# EAGLE board proiect_v13 (EAGLE 9.7.0)
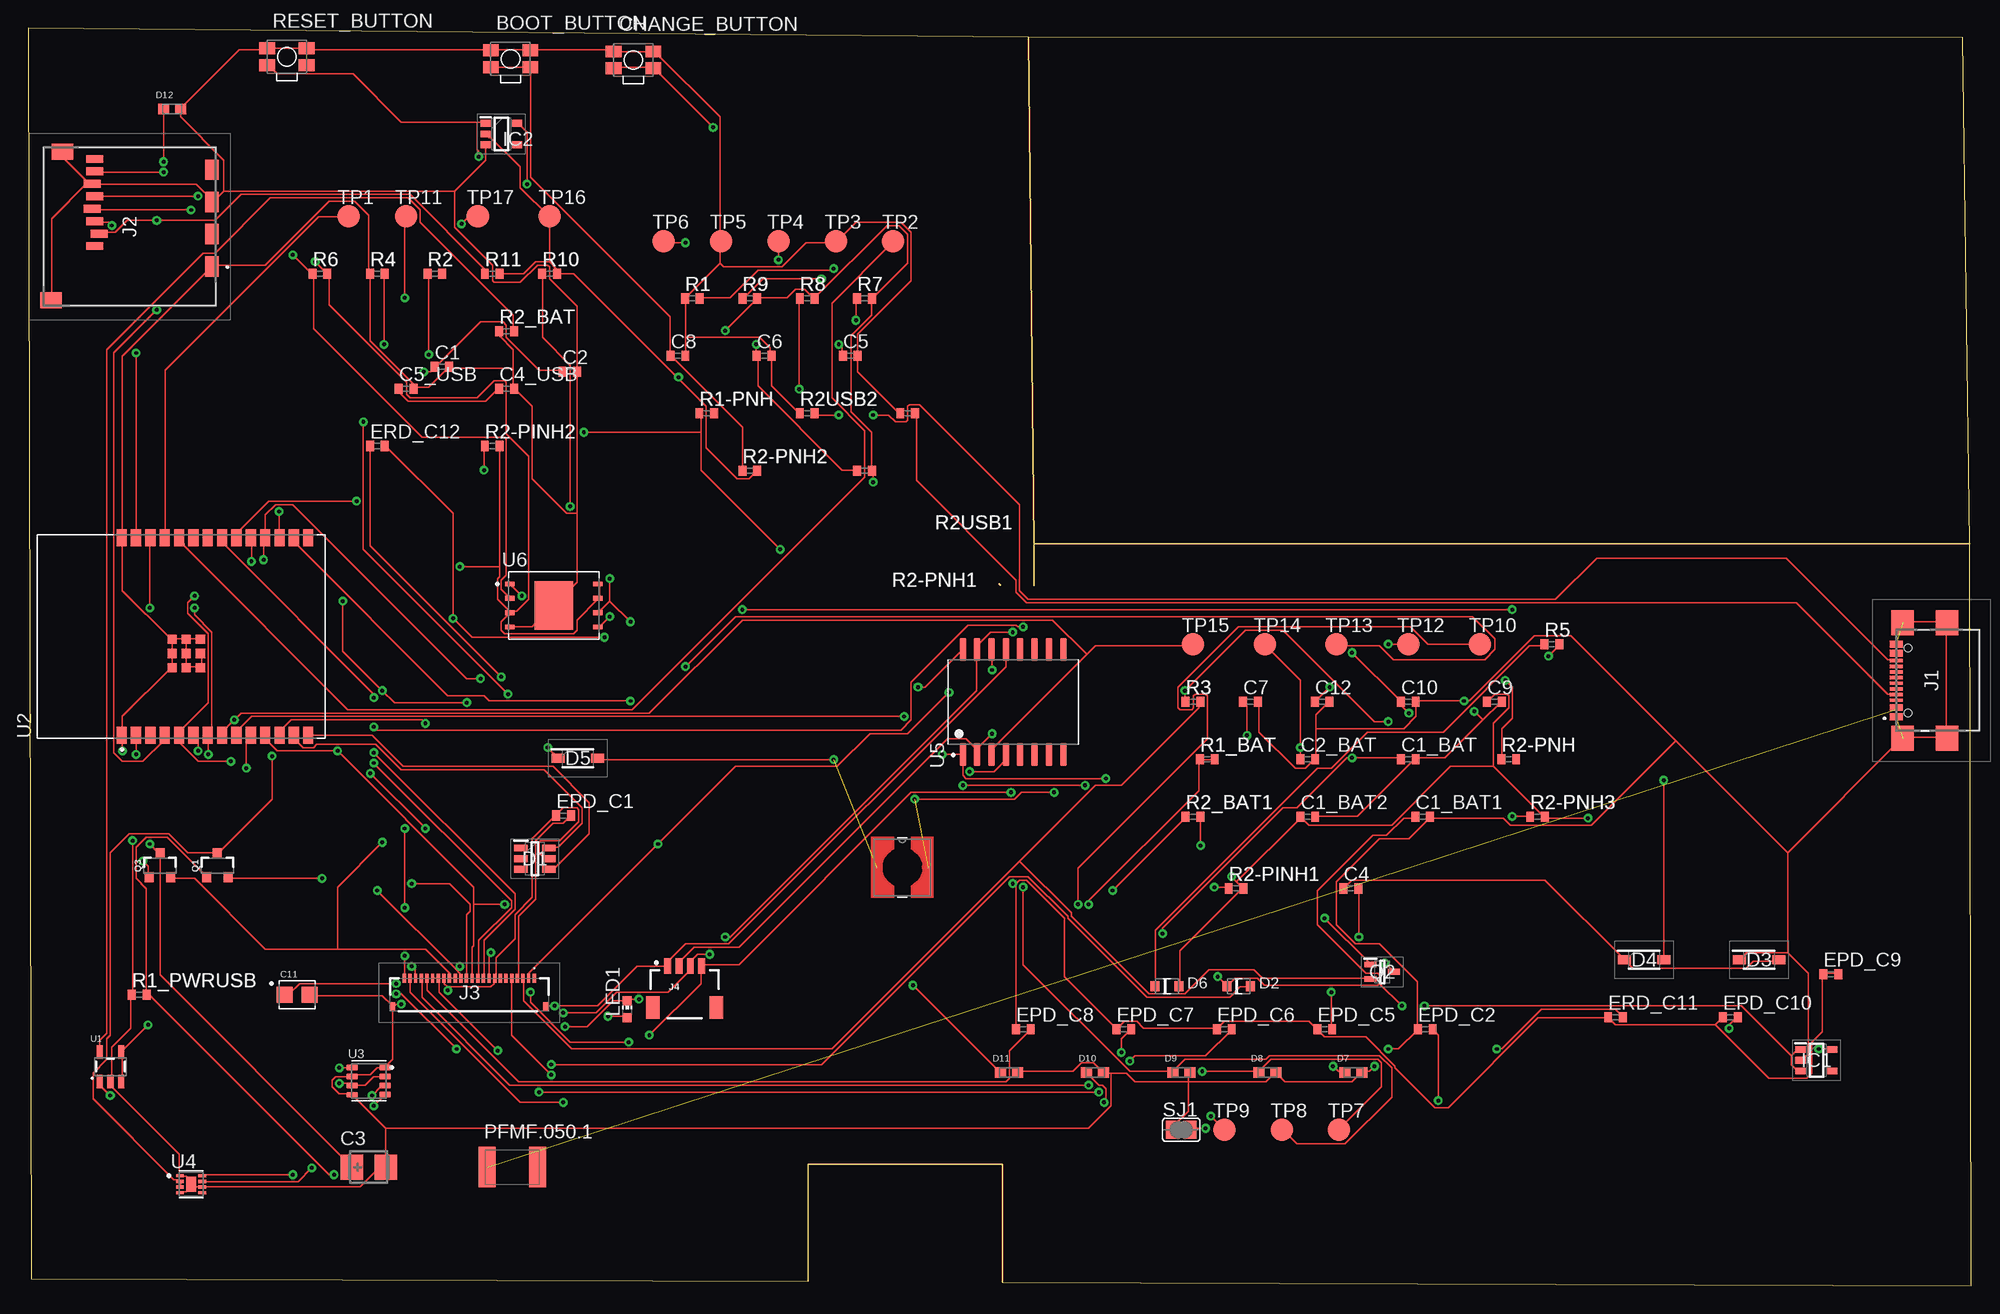
[diagram p0: board, top side]
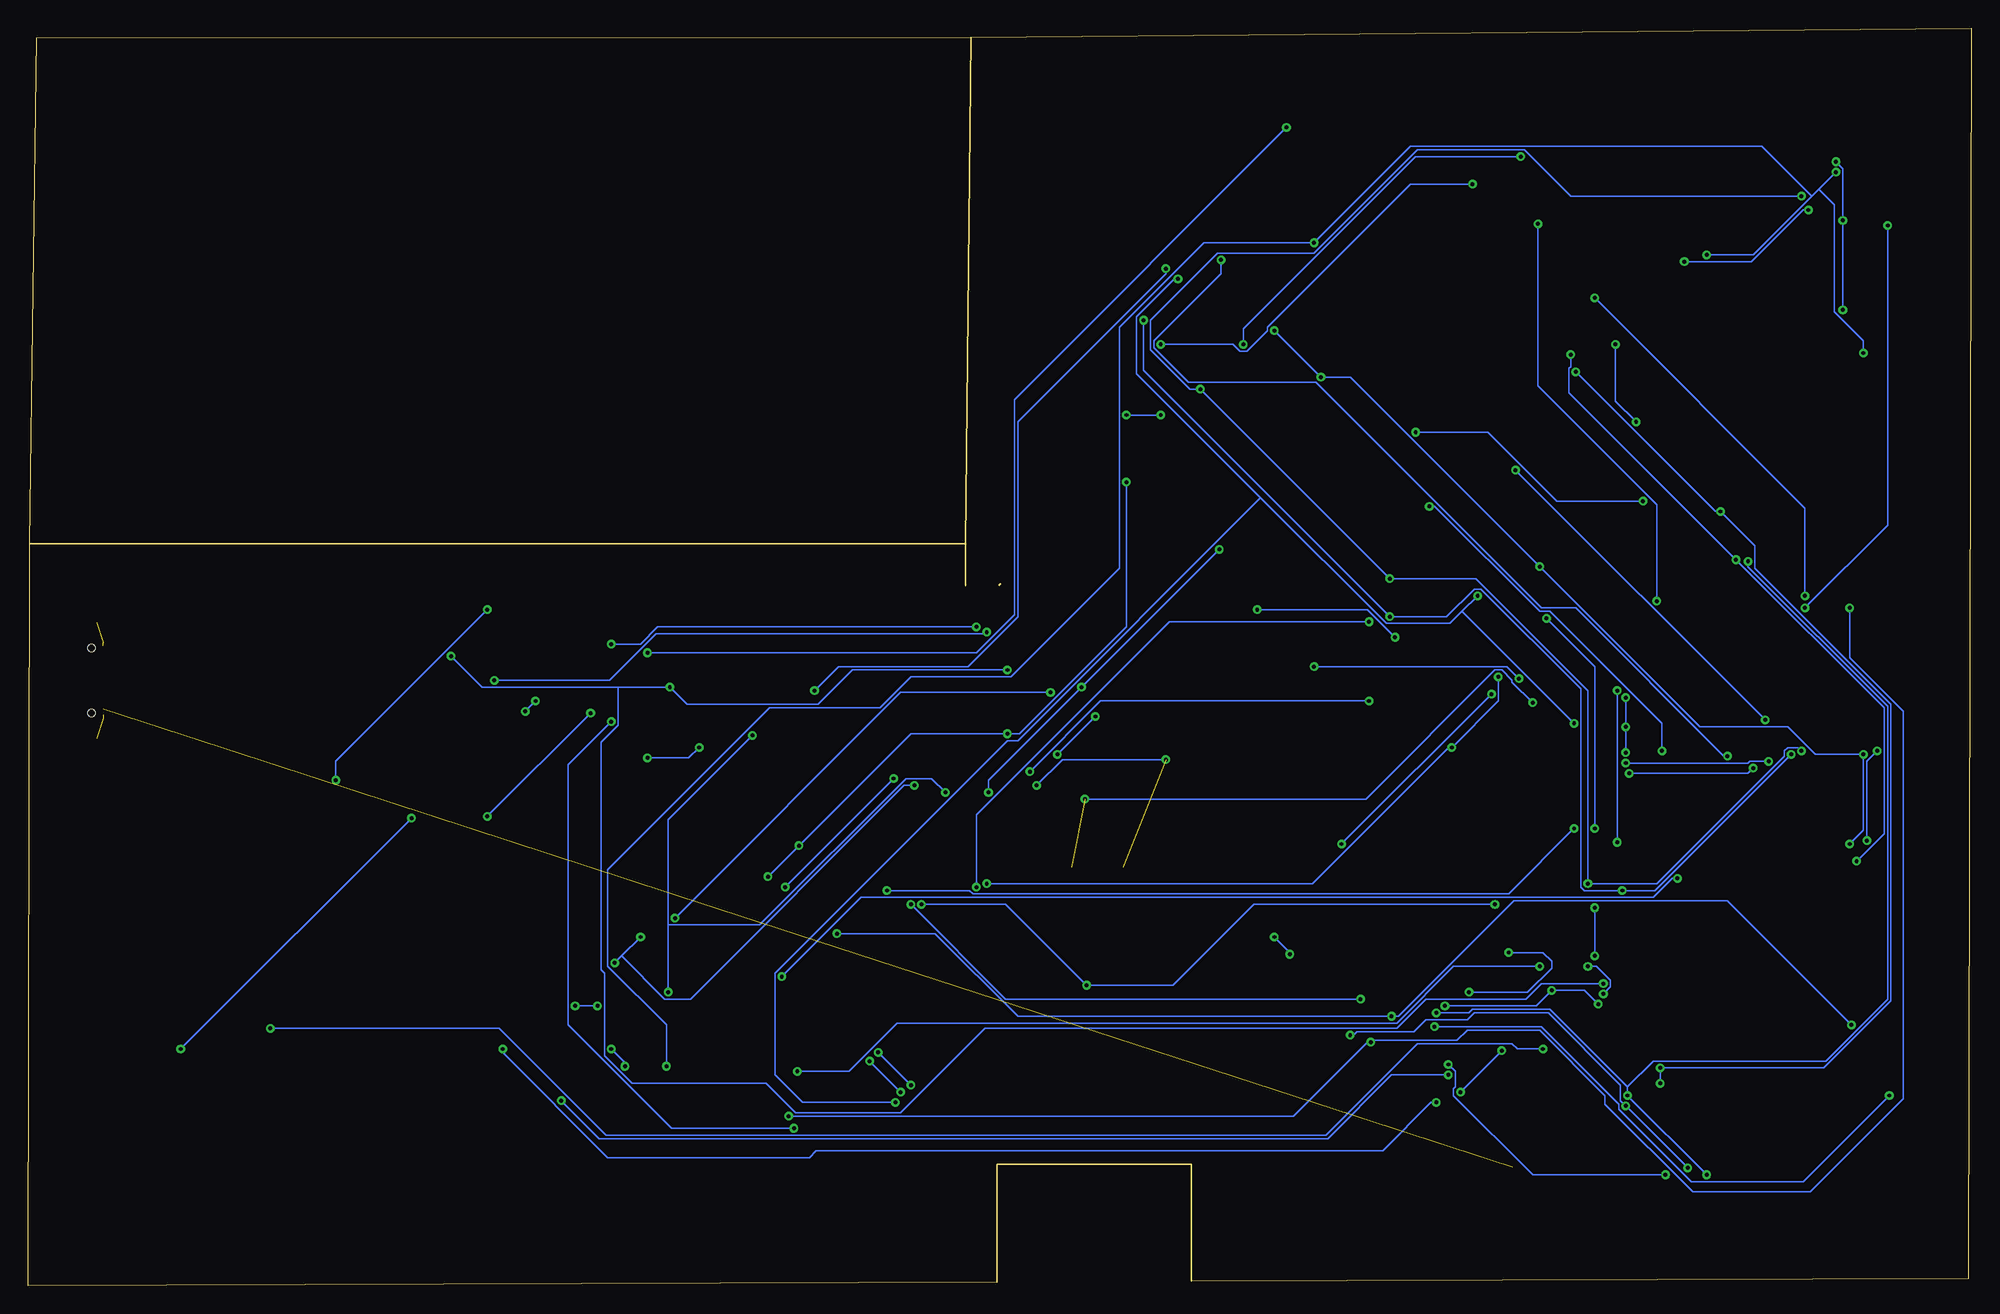
[diagram p1: board, bottom side, seen from below]

Size 171.92 x 111.22 mm. Coordinates in mm from the lower left corner, seen from the top.
Outline: 171.78,65.63 171.92,0 86.21,0.3 86.21,10.73 69,10.73 69,0.36 0.24,0.61 0,111.22 88.49,110.41
Outline: 171.78,65.63 171.17,110.36 88.49,110.41
Outline: 85.92,62.09 86.04,61.96
Outline: 89,61.89 89,65.63
Outline: 89,65.63 88.49,110.41
Outline: 89,65.63 171.78,65.63
Copper layers (1*16): Top 0.035mm / dielectric 1.5mm / Bottom 0.035mm
Design rules "Fusion Electronics Design Rules": minimum track width 6mil, minimum drill 0.35mm, track to track 6mil, track to pad 6mil, pad to pad 6mil, via to via 6mil, smd to smd 6mil, copper to edge 40mil, drill to drill 6mil, minimum pad ring 10mil, minimum via ring 8mil, stop-mask expansion 4mil, vias tented up to drill 9999mil, thermal gap 10mil

## Footprints (pad centres in the part's own frame; a part is rotated, then mirrored left to right if it is on the bottom)
MYBUTTON = smd 1.4 x 1.05: 1 1.75,0.75; 2 -1.75,0.75; 3 -1.75,-0.75; 4 1.75,-0.75
EAGLE-LTSPICE_C0402 = smd 0.7 x 0.9: 1 -0.65,0; 2 0.65,0
RCL_CT3528 = smd 2 x 2.2: + -1.5,0; - 1.5,0
CAPCP3225X100N = smd 1.4 x 1.4: 1 -1.1,0; 2 1.1,0
ESP32_WROVER_EAGLE-LTSPICE_C0402 = smd 0.7 x 0.9: 1 -0.65,0; 2 0.65,0
SOT95P280X145-6N = smd 1.2 x 0.6: 1 -1.25,0.95; 2 -1.25,0; 3 -1.25,-0.95; 4 1.25,-0.95; 5 1.25,0; 6 1.25,0.95
ESP32_WROVER_AVX---SD0805S020S1R0_AVX_SD0805S020S1R0_0 = smd 0.8 x 0.9: 1 -1.05,0; 2 1.05,0
SOD3716X135N = smd 1.15 x 0.8: 1 -1.75,0; 2 1.75,0
DIOC1608X36N = smd 0.97 x 0.94: 1 -0.75,0; 2 0.75,0
SOT95P280X120-5N = smd 0.9 x 0.6: 1 -1.4,0.95; 2 -1.4,0; 3 -1.4,-0.95; 4 1.4,-0.95; 5 1.4,0.95
SOT95P280X125-5N = smd 0.9 x 0.6: 1 -1.4,0.95; 2 -1.4,0; 3 -1.4,-0.95; 4 1.4,-0.95; 5 1.4,0.95
SAMACSYS_PARTS_USB4110GFA = smd 0.3 x 1.15: A1 -3.35,3.678; A4 -2.55,3.678; A5 -1.25,3.678; A6 -0.25,3.678; A7 0.25,3.678; A8 1.25,3.678; A9 2.55,3.678; A12 3.35,3.678; B1 3.05,3.678; B4 2.25,3.678; B5 1.75,3.678; B6 0.75,3.678; B7 -0.75,3.678; B8 -1.75,3.678; B9 -2.25,3.678; B12 -3.05,3.678 | smd 2.18 x 2: MP1 -5.11,-0.827; MP2 5.11,-0.827; MP3 -5.11,3.103; MP4 5.11,3.103 | hole 0.65: -2.89,2.603; 2.89,2.603
112ATAARR03ATTEND = smd 1.8 x 1.2: G1 10.6,10.4; G2 4.9,10.4; S1 7.75,10.4; S2 2.05,10.4 | smd 1.4 x 1.9: G3 13.6,-3.85; G4 0.45,-2.85 | smd 0.7 x 1.5: P1 8.8,0; P2 7.7,0.4; P3 6.6,0; P4 5.5,-0.2; P5 4.4,0; P6 3.3,-0.2; P7 2.2,0; P8 1.1,0
FH34SRJ24S05SH99 = smd 0.3 x 0.8: 1 5.75,1.45; 2 5.25,1.45; 3 4.75,1.45; 4 4.25,1.45; 5 3.75,1.45; 6 3.25,1.45; 7 2.75,1.45; 8 2.25,1.45; 9 1.75,1.45; 10 1.25,1.45; 11 0.75,1.45; 12 0.25,1.45; 13 -0.25,1.45; 14 -0.75,1.45; 15 -1.25,1.45; 16 -1.75,1.45; 17 -2.25,1.45; 18 -2.75,1.45; 19 -3.25,1.45; 20 -3.75,1.45; 21 -4.25,1.45; 22 -4.75,1.45; 23 -5.25,1.45; 24 -5.75,1.45 | smd 0.4 x 0.8: MP1 6.75,-1.05; MP2 -6.75,-1.05
JST04_1MM_RA = smd 0.6 x 1.35: 1 -1.5,0; 2 -0.5,0; 3 0.5,0; 4 1.5,0 | smd 1.2 x 2: NC1 2.8,-3.675; NC2 -2.8,-3.675
IND_4828-WE-TPC_WRE = smd 0.127 x 0.127: 1 -2.286,0; 2 2.286,0
ADAFRUIT_CHIP-LED0603 = smd 0.8 x 0.8: A 0,-0.75; C 0,0.75
ESP32C6_VARISTOR_CT/CN1812 = smd 1.5 x 3.6: 1 -2.25,0; 2 2.25,0
ESP32_WROVER_SPARKFUN-DISCRETESEMI_SOT23-3 = smd 0.8 x 0.9: 1 -0.95,-1; 2 0.95,-1; 3 0,1.1
SOT65P210X110-3N = smd 1.05 x 0.5: 1 -1.05,0.65; 2 -1.05,-0.65; 3 1.05,0
ESP32_WROVER_EAGLE-LTSPICE_R0402 = smd 0.7 x 0.9: 1 -0.65,0; 2 0.65,0
SJ = smd 1.168 x 1.6: 1 -0.762,0; 2 0.762,0
TP20R = smd 2 x 2: TP 0,0
ESP32_WROVER_SPARKFUN-IC-POWER_SOT23-5 = smd 0.55 x 1.2: 1 -0.95,-1.3; 2 0,-1.3; 3 0.95,-1.3; 4 0.95,1.3; 5 -0.95,1.3
XCVR_ESP32-C6-WROOM-1-N8 = smd 1.5 x 0.9: 1 -8.75,5.26; 2 -8.75,3.99; 3 -8.75,2.72; 4 -8.75,1.45; 5 -8.75,0.18; 6 -8.75,-1.09; 7 -8.75,-2.36; 8 -8.75,-3.63; 9 -8.75,-4.9; 10 -8.75,-6.17; 11 -8.75,-7.44; 12 -8.75,-8.71; 13 -8.75,-9.98; 14 -8.75,-11.25; 15 8.75,-11.25; 16 8.75,-9.98; 17 8.75,-8.71; 18 8.75,-7.44; 19 8.75,-6.17; 20 8.75,-4.9; 21 8.75,-3.63; 22 8.75,-2.36; 23 8.75,-1.09; 24 8.75,0.18; 25 8.75,1.45; 26 8.75,2.72; 27 8.75,3.99; 28 8.75,5.26 | smd 0.8 x 0.8: 29_1 -2.755,0.79; 29_2 -1.505,0.79; 29_3 -0.255,0.79; 29_4 -2.755,-0.46; 29_5 -1.505,-0.46; 29_6 -0.255,-0.46; 29_7 -2.755,-1.71; 29_8 -1.505,-1.71; 29_9 -0.255,-1.71
ESP32_WROVER_BME680_PSON80P300X300X100-8N = smd 1.016 x 0.5: 1 1.458,1.2; 2 1.458,0.4; 3 1.458,-0.4; 4 1.458,-1.2; 5 -1.458,-1.22; 6 -1.458,-0.4; 7 -1.458,0.4; 8 -1.458,1.2
SON50P200X200X80-9N = smd 0.76 x 0.27: 1 -0.985,0.75; 2 -0.985,0.25; 3 -0.985,-0.25; 4 -0.985,-0.75; 5 0.985,-0.75; 6 0.985,-0.25; 7 0.985,0.25; 8 0.985,0.75 | smd 0.9 x 1.3: 9 0,0
SOIC127P1032X265-16N = smd 2.05 x 0.59: 1 -4.655,4.445; 2 -4.655,3.175; 3 -4.655,1.905; 4 -4.655,0.635; 5 -4.655,-0.635; 6 -4.655,-1.905; 7 -4.655,-3.175; 8 -4.655,-4.445; 9 4.655,-4.445; 10 4.655,-3.175; 11 4.655,-1.905; 12 4.655,-0.635; 13 4.655,0.635; 14 4.655,1.905; 15 4.655,3.175; 16 4.655,4.445
SON127P600X800X80-9N = smd 0.94 x 0.44: 1 -3.895,1.905; 2 -3.895,0.635; 3 -3.895,-0.635; 4 -3.895,-1.905; 5 3.895,-1.905; 6 3.895,-0.635; 7 3.895,0.635; 8 3.895,1.905 | smd 3.4 x 4.3: 9 0,0

## Placement (x,y rotation side)
BOOT_BUTTON  BUTTON_CUSYOMV1  [MYBUTTON]  42.68,108.52 0 top
C1  100nF  [EAGLE-LTSPICE_C0402]  36.6,81.27 0 top
C1_BAT  4.7uF  [EAGLE-LTSPICE_C0402]  122.11,46.56 0 top
C1_BAT1  4.7uF  [EAGLE-LTSPICE_C0402]  123.38,41.48 0 top
C1_BAT2  4.7uF  [EAGLE-LTSPICE_C0402]  113.22,41.48 0 top
C2  100nF  [EAGLE-LTSPICE_C0402]  47.91,80.84 0 top
C2_BAT  4.7uF  [EAGLE-LTSPICE_C0402]  113.22,46.56 0 top
C3  100 uF TANT  [RCL_CT3528]  30.14,10.48 0 top
C4  4.7uF/25V  [EAGLE-LTSPICE_C0402]  117.03,35.13 0 top
C4_USB  100nF  [EAGLE-LTSPICE_C0402]  42.33,79.35 0 top
C5  100nF  [EAGLE-LTSPICE_C0402]  72.73,82.24 0 top
C5_USB  4.7uF  [EAGLE-LTSPICE_C0402]  33.44,79.35 0 top
C6  100nF  [EAGLE-LTSPICE_C0402]  65.11,82.24 0 top
C7  10uF  [EAGLE-LTSPICE_C0402]  108.14,51.64 0 top
C8  100nF  [EAGLE-LTSPICE_C0402]  57.49,82.24 0 top
C9  100nF  [EAGLE-LTSPICE_C0402]  129.73,51.64 0 top
C10  100nF  [EAGLE-LTSPICE_C0402]  122.11,51.64 0 top
C11  CPH3225A  [CAPCP3225X100N]  23.79,25.72 0 top
C12  100nF  [ESP32_WROVER_EAGLE-LTSPICE_C0402]  114.49,51.64 0 top
CHANGE_BUTTON  BUTTON_CUSYOMV1  [MYBUTTON]  53.55,108.42 0 top
D1  USBLC6-2SC6Y  [SOT95P280X145-6N]  44.83,37.77 0 top
D2  ESP32_WROVER_AVX---SD0805S020S1R0_AVX_SD0805S020S1R0_0_0AVX_SD0805S020S1R0_0_0  [ESP32_WROVER_AVX---SD0805S020S1R0_AVX_SD0805S020S1R0_0]  107.1,26.48 0 top
D3  MBR0530  [SOD3716X135N]  153.14,28.82 0 top
D4  MBR0530  [SOD3716X135N]  142.98,28.82 0 top
D5  MBR0530  [SOD3716X135N]  48.64,46.66 0 top
D6  ESP32_WROVER_AVX---SD0805S020S1R0_AVX_SD0805S020S1R0_0_0AVX_SD0805S020S1R0_0_0  [ESP32_WROVER_AVX---SD0805S020S1R0_AVX_SD0805S020S1R0_0]  100.75,26.48 0 top
D7  PGB1010603MR  [DIOC1608X36N]  117.26,18.86 0 top
D8  PGB1010603MR  [DIOC1608X36N]  109.64,18.86 0 top
D9  PGB1010603MR  [DIOC1608X36N]  102.02,18.86 0 top
D10  PGB1010603MR  [DIOC1608X36N]  94.4,18.86 0 top
D11  PGB1010603MR  [DIOC1608X36N]  86.78,18.86 0 top
D12  PGB1010603MR  [DIOC1608X36N]  12.74,104.08 0 top
EPD_C1  [EAGLE-LTSPICE_C0402]  47.37,41.58 0 top
EPD_C2  [EAGLE-LTSPICE_C0402]  123.61,22.67 0 top
EPD_C5  [EAGLE-LTSPICE_C0402]  114.72,22.67 0 top
EPD_C6  [EAGLE-LTSPICE_C0402]  105.83,22.67 0 top
EPD_C7  [EAGLE-LTSPICE_C0402]  96.94,22.67 0 top
EPD_C8  [EAGLE-LTSPICE_C0402]  88.05,22.67 0 top
EPD_C9  [EAGLE-LTSPICE_C0402]  159.49,27.55 0 top
EPD_C10  [ESP32_WROVER_EAGLE-LTSPICE_C0402]  150.6,23.74 0 top
ERD_C11  [ESP32_WROVER_EAGLE-LTSPICE_C0402]  140.44,23.74 0 top
ERD_C12  1uF  [ESP32_WROVER_EAGLE-LTSPICE_C0402]  30.9,74.27 0 top
IC1  XC6220A331MR-G  [SOT95P280X120-5N]  158.22,19.93 0 top
IC2  BD5229G-TR  [SOT95P280X125-5N]  41.86,101.86 0 top
J1  SAMACSYS_PARTS_USB4110-GF-A  [SAMACSYS_PARTS_USB4110GFA]  168.95,53.53 90 top
J2  112A-TAAR-R03_ATTEND  [112ATAARR03ATTEND]  5.87,100.76 270 top
J3  FH34SRJ-24S-0.5SH_99_  [FH34SRJ24S05SH99]  39.03,25.72 0 top
J4  QWIIC_RIGHT_ANGLE  [JST04_1MM_RA]  58.08,28.26 0 top
L1  68uH  [IND_4828-WE-TPC_WRE]  77.35,36.99 0 top
LED1  [ADAFRUIT_CHIP-LED0603]  53,24.45 0 top
PFMF.050.1  ESP32C6_VARISTORCN1812  [ESP32C6_VARISTOR_CT/CN1812]  42.84,10.48 0 top
Q1  20V/4.2A/52mΩ/1.4W  [ESP32_WROVER_SPARKFUN-DISCRETESEMI_SOT23-3]  16.74,37.13 0 top
Q2  SI1308EDL-T1-GE3  [SOT65P210X110-3N]  119.8,27.75 0 top
Q3  20V/4.2A/52mΩ/1.4W  [ESP32_WROVER_SPARKFUN-DISCRETESEMI_SOT23-3]  11.66,37.13 0 top
R1  2.2  [ESP32_WROVER_EAGLE-LTSPICE_R0402]  58.76,87.32 0 top
R1-PNH  10k  [ESP32_WROVER_EAGLE-LTSPICE_R0402]  60.03,77.16 0 top
R1_BAT  200  [ESP32_WROVER_EAGLE-LTSPICE_R0402]  104.33,46.56 0 top
R1_PWRUSB  100k  [ESP32_WROVER_EAGLE-LTSPICE_R0402]  9.82,25.72 0 top
R2  10k  [ESP32_WROVER_EAGLE-LTSPICE_R0402]  35.98,89.51 0 top
R2-PINH1  100k  [ESP32_WROVER_EAGLE-LTSPICE_R0402]  106.87,35.13 0 top
R2-PINH2  100k  [ESP32_WROVER_EAGLE-LTSPICE_R0402]  41.06,74.27 0 top
R2-PNH  10k  [ESP32_WROVER_EAGLE-LTSPICE_R0402]  131,46.56 0 top
R2-PNH1  10k  [ESP32_WROVER_EAGLE-LTSPICE_R0402]  74,72.08 0 top
R2-PNH2  10k  [ESP32_WROVER_EAGLE-LTSPICE_R0402]  63.84,72.08 0 top
R2-PNH3  10k  [ESP32_WROVER_EAGLE-LTSPICE_R0402]  133.54,41.48 0 top
R2_BAT  2k  [ESP32_WROVER_EAGLE-LTSPICE_R0402]  42.33,84.43 0 top
R2_BAT1  2k  [ESP32_WROVER_EAGLE-LTSPICE_R0402]  103.06,41.48 0 top
R2USB1  5k1  [ESP32_WROVER_EAGLE-LTSPICE_R0402]  77.81,77.16 0 top
R2USB2  5k1  [ESP32_WROVER_EAGLE-LTSPICE_R0402]  68.92,77.16 0 top
R3  0.47  [ESP32_WROVER_EAGLE-LTSPICE_R0402]  103.06,51.64 0 top
R4  10k  [ESP32_WROVER_EAGLE-LTSPICE_R0402]  30.9,89.51 0 top
R5  15  [ESP32_WROVER_EAGLE-LTSPICE_R0402]  134.81,56.72 0 top
R6  10k  [ESP32_WROVER_EAGLE-LTSPICE_R0402]  25.82,89.51 0 top
R7  10k  [ESP32_WROVER_EAGLE-LTSPICE_R0402]  74,87.32 0 top
R8  10k  [ESP32_WROVER_EAGLE-LTSPICE_R0402]  68.92,87.32 0 top
R9  10k  [ESP32_WROVER_EAGLE-LTSPICE_R0402]  63.84,87.32 0 top
R10  10k  [ESP32_WROVER_EAGLE-LTSPICE_R0402]  46.14,89.51 0 top
R11  10k  [ESP32_WROVER_EAGLE-LTSPICE_R0402]  41.06,89.51 0 top
RESET_BUTTON  BUTTON_CUSYOMV1  [MYBUTTON]  22.89,108.7 0 top
SJ1  [SJ]  102.02,13.78 0 top
TP1  TPTP20R  [TP20R]  28.36,94.59 0 top
TP2  TPTP20R  [TP20R]  76.54,92.4 0 top
TP3  TPTP20R  [TP20R]  71.46,92.4 0 top
TP4  TPTP20R  [TP20R]  66.38,92.4 0 top
TP5  TPTP20R  [TP20R]  61.3,92.4 0 top
TP6  TPTP20R  [TP20R]  56.22,92.4 0 top
TP7  TPTP20R  [TP20R]  115.99,13.78 0 top
TP8  TPTP20R  [TP20R]  110.91,13.78 0 top
TP9  TPTP20R  [TP20R]  105.83,13.78 0 top
TP10  TPTP20R  [TP20R]  128.46,56.72 0 top
TP11  TPTP20R  [TP20R]  33.44,94.59 0 top
TP12  TPTP20R  [TP20R]  122.11,56.72 0 top
TP13  TPTP20R  [TP20R]  115.76,56.72 0 top
TP14  TPTP20R  [TP20R]  109.41,56.72 0 top
TP15  TPTP20R  [TP20R]  103.06,56.72 0 top
TP16  TPTP20R  [TP20R]  46.14,94.59 0 top
TP17  TPTP20R  [TP20R]  39.79,94.59 0 top
U1  ESP32_WROVER_SPARKFUN-IC-POWER_MCP73831  [ESP32_WROVER_SPARKFUN-IC-POWER_SOT23-5]  7.28,19.37 0 top
U2  ESP32-C6-WROOM-1-N8  [XCVR_ESP32-C6-WROOM-1-N8]  13.53,57.42 90 top
U3  ESP32_WROVER_BME680_BME680  [ESP32_WROVER_BME680_PSON80P300X300X100-8N]  30.14,18.1 0 top
U4  MAX17048G+T10  [SON50P200X200X80-9N]  14.41,8.96 0 top
U5  DS3231SN#  [SOIC127P1032X265-16N]  87.14,51.62 90 top
U6  W25Q512JVEIQ  [SON127P600X800X80-9N]  46.51,60.16 0 top

## Library data of the parts
BOOT_BUTTON CHANGE_BUTTON LED1 PFMF.050.1 RESET_BUTTON SJ1 TP1-TP17 = DeskAssistant v19 v1
C1 C1_BAT C1_BAT1 C1_BAT2 C2 C2_BAT C4 C4_USB C5 C5_USB C6-C10 C12 EPD_C1 EPD_C2 EPD_C5-EPD_C10 ERD_C11 ERD_C12 = DeskAssistant v19 v1; SPICEMODEL: NONE; SPICEPREFIX: C
C3 = DeskAssistant v19 v1; SPICEPREFIX: C
C11 = DeskAssistant v19 v1; AVAILABILITY: Not in stock; CHECK_PRICES: https://www.snapeda.com/parts/CPH3225A/Seiko+Instruments/view-part/?ref=eda; DESCRIPTION: 11 mF (EDLC) Supercapacitor 3.3 V 1210 (3225 Metric) - -; MF: Seiko Instruments; MP: CPH3225A; PACKAGE: 1210 Seiko; PRICE: None; PURCHASE-URL: https://www.snapeda.com/api/url_track_click_mouser/?unipart_id=562593&manufacturer=Seiko Instruments&part_name=CPH3225A&search_term=None; SNAPEDA_LINK: https://www.snapeda.com/parts/CPH3225A/Seiko+Instruments/view-part/?ref=snap
D1 = DeskAssistant v19 v1; AVAILABILITY: In Stock; CHECK_PRICES: https://www.snapeda.com/parts/USBLC6-2SC6Y/STMicroelectronics/view-part/?ref=eda; DESCRIPTION: 17V Clamp 5A (8/20µs) Ipp Tvs Diode Surface Mount SOT-23-6; MF: STMicroelectronics; MP: USBLC6-2SC6Y; PACKAGE: SOT-23-6 STMicroelectronics; PRICE: None; SNAPEDA_LINK: https://www.snapeda.com/parts/USBLC6-2SC6Y/STMicroelectronics/view-part/?ref=snap
D2 D6 = DeskAssistant v19 v1; CENTROID_NOT_SPECIFIED: No; DATASHEET: http://datasheets.avx.com/schottky.pdf; DIGIKEY_DESCRIPTION: DIODE SCHOTTKY 20V 1A 0805; DIGIKEY_PART_NUMBER: 478-7800-1-ND; LEAD_FREE: yes; MF: AVX; MOUSER_PART_NUMBER: 581-SD0805S020S1R0; PACKAGE: 0805 (2012 metric); PREFIX: D; ROHS: yes; TEMPERATURE_RANGE_HIGH: +125°C; TEMPERATURE_RANGE_LOW: -55°C
D3-D5 = DeskAssistant v19 v1; AVAILABILITY: In Stock; CHECK_PRICES: https://www.snapeda.com/parts/MBR0530/Onsemi/view-part/?ref=eda; DESCRIPTION: Diode Schottky 30 V 500mA Surface Mount SOD-123; MF: ON Semiconductor; MP: MBR0530; PACKAGE: SOD-123-2 ON Semiconductor; PRICE: None; PURCHASE-URL: https://www.snapeda.com/api/url_track_click_mouser/?unipart_id=179458&manufacturer=ON Semiconductor&part_name=MBR0530&search_term=None; SNAPEDA_LINK: https://www.snapeda.com/parts/MBR0530/Onsemi/view-part/?ref=snap
D7-D12 = DeskAssistant v19 v1; AVAILABILITY: In Stock; CHECK_PRICES: https://www.snapeda.com/parts/PGB1010603MR/Littelfuse/view-part/?ref=eda; DESCRIPTION: 150V (Typ) Clamp - Ipp Tvs Diode Surface Mount 0603 (1608 Metric); MF: Littelfuse Inc.; MP: PGB1010603MR; PACKAGE: 0603 Littelfuse Inc.; PRICE: None; PURCHASE-URL: https://www.snapeda.com/api/url_track_click_mouser/?unipart_id=5659453&manufacturer=Littelfuse Inc.&part_name=PGB1010603MR&search_term=None; SNAPEDA_LINK: https://www.snapeda.com/parts/PGB1010603MR/Littelfuse/view-part/?ref=snap
IC1 = DeskAssistant v19 v1; DESCRIPTION: LDO Voltage Regulators; HEIGHT: 1.2mm; MANUFACTURER_NAME: Torex; MANUFACTURER_PART_NUMBER: XC6220A331MR-G; MOUSER_PART_NUMBER: 865-XC6220A331MR-G; MOUSER_PRICE-STOCK: https://www.mouser.co.uk/ProductDetail/Torex-Semiconductor/XC6220A331MR-G?qs=AsjdqWjXhJ8ZSWznL1J0gg%3D%3D
IC2 = DeskAssistant v19 v1; DESCRIPTION: Voltage Detector with Adjustable Delay Time: CMOS processes are utilized to develop high precision, low current consumption CMOS reset ICs that allow arbitrary setting of the delay time. The extensive lineup includes both Nch Open Drain and CMOS output types in a wide range of detection voltages (from 2.3V to 6.0V, in 0.1V steps), enabling selection of the ideal solution based on customer requirements. In addition, the entire series is of course both lead-free and RoHS-compliant.; HEIGHT: 1.25mm; MANUFACTURER_NAME: ROHM Semiconductor; MANUFACTURER_PART_NUMBER: BD5229G-TR; MOUSER_PART_NUMBER: 755-BD5229G-TR; MOUSER_PRICE-STOCK: https://www.mouser.co.uk/ProductDetail/ROHM-Semiconductor/BD5229G-TR?qs=4kLU8WoGk0vvnhrrYwdszw%3D%3D
J1 = DeskAssistant v19 v1; DESCRIPTION: CONN USB 2.0 TYPE-C R/A SMT; HEIGHT: 3.26mm; MANUFACTURER_NAME: GCT (GLOBAL CONNECTOR TECHNOLOGY); MANUFACTURER_PART_NUMBER: USB4110-GF-A; MOUSER_PART_NUMBER: 640-USB4110-GF-A; MOUSER_PRICE-STOCK: https://www.mouser.co.uk/ProductDetail/GCT/USB4110-GF-A?qs=KUoIvG%2F9IlYiZvIXQjyJeA%3D%3D
J2 = DeskAssistant v19 v1; DESCRIPTION: Micro SD Card Socket, Push-Push Type, Top Mount, SMT, H=1.83mm, 10u; HEIGHT: 1.9mm; MANUFACTURER_NAME: ATTEND; MANUFACTURER_PART_NUMBER: 112A-TAAR-R03 ATTEND
J3 = DeskAssistant v19 v1; DESCRIPTION: 24 Position FFC, FPC Connector Contacts, Top and Bottom 0.020" (0.50mm) Surface Mount, Right Angle; HEIGHT: 1.1mm; MANUFACTURER_NAME: Hirose; MANUFACTURER_PART_NUMBER: FH34SRJ-24S-0.5SH(99); MOUSER_PART_NUMBER: 798-FH34SRJ24S05SH99; MOUSER_PRICE-STOCK: https://www.mouser.co.uk/ProductDetail/Hirose-Connector/FH34SRJ-24S-0.5SH99?qs=vcbW%252B4%252BSTIpKBl5ap9J8Fw%3D%3D
J4 = DeskAssistant v19 v1; PROD_ID: CONN-13694
L1 = DeskAssistant v19 v1; COPYRIGHT: Copyright (C) 2024 Ultra Librarian. All rights reserved.; MANUFACTURER_PART_NUMBER: 744043680; MFR_NAME: Wurth Electronics
Q1 Q3 = DeskAssistant v19 v1; PROD_ID: TRAN-14388
Q2 = DeskAssistant v19 v1; AVAILABILITY: In Stock; CHECK_PRICES: https://www.snapeda.com/parts/SI1308EDL-T1-GE3/Vishay+Siliconix/view-part/?ref=eda; DESCRIPTION: Si1308EDL-T1-GE3 N-channel MOSFET Transistor, 1.5 A, 30 V, 3-Pin SC-70 | Siliconix / Vishay SI1308EDL-T1-GE3; MF: Vishay Siliconix; MP: SI1308EDL-T1-GE3; PACKAGE: SOT-323 Vishay Semiconductor; PRICE: None; PURCHASE-URL: https://www.snapeda.com/api/url_track_click_mouser/?unipart_id=274603&manufacturer=Vishay Siliconix&part_name=SI1308EDL-T1-GE3&search_term=None; SNAPEDA_LINK: https://www.snapeda.com/parts/SI1308EDL-T1-GE3/Vishay+Siliconix/view-part/?ref=snap
R1 R1-PNH R1_BAT R1_PWRUSB R2 R2-PINH1 R2-PINH2 R2-PNH R2-PNH1-R2-PNH3 R2_BAT R2_BAT1 R2USB1 R2USB2 R3-R11 = DeskAssistant v19 v1; SPICEMODEL: NONE; SPICEPREFIX: R
U1 = DeskAssistant v19 v1; PROD_ID: IC-09995
U2 = DeskAssistant v19 v1; AVAILABILITY: In Stock; CHECK_PRICES: https://www.snapeda.com/parts/ESP32-C6-WROOM-1-N8/Espressif+Systems/view-part/?ref=eda; DESCRIPTION: Multiprotocol Modules ESP32-C6 module, Wi-Fi 6 in 2.4 GHz band, Bluetooth 5, Zigbee 3.0 and Thread. ESP34-WROOM Compatible - ENGINEERING SAMPLE; MF: Espressif Systems; MP: ESP32-C6-WROOM-1-N8; PACKAGE: None; PRICE: None; SNAPEDA_LINK: https://www.snapeda.com/parts/ESP32-C6-WROOM-1-N8/Espressif+Systems/view-part/?ref=snap
U3 = DeskAssistant v19 v1; AVAILABILITY: Unavailable; DESCRIPTION: Integrated Environmental Unit; MF: Bosch Sensortec; MP: BME680; PACKAGE: LGA-8 Bosch Tools; PRICE: None
U4 = DeskAssistant v19 v1; AVAILABILITY: In Stock; CHECK_PRICES: https://www.snapeda.com/parts/MAX17048G+T10/Analog+Devices/view-part/?ref=eda; DESCRIPTION: 3µA 1-Cell/2-Cell Fuel Gauge with ModelGauge; MF: Analog Devices; MP: MAX17048G+T10; PACKAGE: TDFN-8 Maxim; PRICE: None; PURCHASE-URL: https://www.snapeda.com/api/url_track_click_mouser/?unipart_id=329239&manufacturer=Analog Devices&part_name=MAX17048G+T10&search_term=None; SNAPEDA_LINK: https://www.snapeda.com/parts/MAX17048G+T10/Analog+Devices/view-part/?ref=snap
U5 = DeskAssistant v19 v1; AVAILABILITY: In Stock; CHECK_PRICES: https://www.snapeda.com/parts/DS3231SN%23/Analog+Devices/view-part/?ref=eda; DESCRIPTION: Extremely Accurate I²C-Integrated RTC/TCXO/Crystal; MF: Analog Devices; MP: DS3231SN#; PACKAGE: SOIC-16 Maxim; PRICE: None; PURCHASE-URL: https://www.snapeda.com/api/url_track_click_mouser/?unipart_id=99048&manufacturer=Analog Devices&part_name=DS3231SN#&search_term=None; SNAPEDA_LINK: https://www.snapeda.com/parts/DS3231SN%23/Analog+Devices/view-part/?ref=snap
U6 = DeskAssistant v19 v1; AVAILABILITY: In Stock; CHECK_PRICES: https://www.snapeda.com/parts/W25Q512JVEIQ/Winbond+Electronics/view-part/?ref=eda; DESCRIPTION: FLASH - NOR Memory IC 512Mb (64M x 8) SPI - Quad I/O 133 MHz 8-WSON (8x6); MF: Winbond Electronics; MP: W25Q512JVEIQ; PACKAGE: Package; PRICE: None; SNAPEDA_LINK: https://www.snapeda.com/parts/W25Q512JVEIQ/Winbond+Electronics/view-part/?ref=snap

## Nets
3V3: C1_BAT2.1 C3.+ C9.1 D6.2 IC1.5 IC2.2 J2.P4 J4.2 Q3.3 R2-PINH1.2 R2-PINH2.2 R2-PNH1.2 R2-PNH2.2 R2-PNH3.2 R2_BAT1.2 R6.2 R7.2 R8.2 R9.2 R10.2 R11.2 TP16.TP U2.2 U5.2 U6.3 U6.7 U6.8
12C_PW: C1.1 C2.1 U2.17 U3.2 U3.6 U3.8
12C_PW1: C5.1 IC2.5
12C_PW3: BOOT_BUTTON.3 BOOT_BUTTON.4 C8.1 R2-PNH2.1
32KHZ: R2-PINH1.1 U2.9 U5.1
DN: J1.A7 J1.B6
DP: J1.A6 J1.B7
EPD_3V3: C7.1 EPD_C5.2 J3.15 J3.16 L1.2 Q3.2 TP17.TP
EPD_3V3_C: Q3.1 R2.1 TP13.TP U2.18
EPD_BUSY: J3.9 TP9.TP U2.26
EPD_CS: D11.1 J3.12 R10.1 TP10.TP U2.11
EPD_DC: J3.11 TP11.TP U2.5
EPD_RST: J3.10 TP12.TP U2.21
FLASH_CS: D10.1 R9.1 U2.12 U6.1
GDR: J3.2 Q2.1 R4.2
GND: BOOT_BUTTON.1 BOOT_BUTTON.2 C1.2 C1_BAT1.2 C1_BAT2.2 C1_BAT.2 C2.2 C2_BAT.2 C3.- C4_USB.2 C5.2 C5_USB.2 C6.2 C7.2 C8.2 C9.2 C10.2 C11.2 C12.2 CHANGE_BUTTON.1 CHANGE_BUTTON.2 D1.5 D3.1 D7.2 D8.2 D9.2 D10.2 D11.2 D12.2 EPD_C1.1 EPD_C2.1 IC1.2 IC2.3 J1.A1 J1.A12 J1.B1 J1.B12 J1.MP1 J1.MP2 J1.MP3 J1.MP4 J2.G1 J2.G2 J2.G3 J2.G4 J2.P6 J3.8 J3.17 J3.MP1 J3.MP2 J4.1 R1.1 R1_PWRUSB.1 R2_BAT.1 R2USB1.1 R2USB2.1 R4.1 RESET_BUTTON.1 RESET_BUTTON.2 SJ1.1 TP3.TP TP5.TP U1.2 U2.1 U2.28 U2.29_1 U2.29_2 U2.29_3 U2.29_4 U2.29_5 U2.29_6 U2.29_7 U2.29_8 U2.29_9 U3.1 U3.5 U3.7 U4.1 U4.4 U4.6 U4.9 U5.13 U6.4 U6.9
GPIO8: R2_BAT1.1 U2.10
INT_RTC: R2-PINH2.1 TP15.TP U2.8 U5.3
IO/BOOT: U2.15
IO_CHANGE: U2.23
MISO: D7.1 J2.P7 R6.1 TP6.TP U2.27 U6.2
MOSI: D8.1 J2.P3 J3.14 R7.1 TP7.TP U2.7 U6.5
N$1: PFMF.050.1.2
N$2: J1.A5 R2USB1.2
N$3: J1.B4
N$4: J1.A9
N$5: J1.B5 R2USB2.2
N$6: J1.B9
N$7: D1.1
N$8: D1.2
N$9: D1.3
N$10: C4_USB.1 C5_USB.1
N$11: C1_BAT1.1 D2.1 IC1.1 IC1.3 Q1.2
N$12: D2.2 Q1.1 R1_PWRUSB.2
N$13: R2_BAT.2 U1.5
N$14: C4.1 D3.2 D4.1
N$15: EPD_C1.2 J3.4
N$16: EPD_C2.2 J3.5
N$17: C6.1 IC2.1 R2-PNH1.1 RESET_BUTTON.3
N$18: C10.1 CHANGE_BUTTON.3 CHANGE_BUTTON.4 R2-PNH3.1
N$21: D6.1 R5.1
N$24: EPD_C8.2 J3.20
N$25: EPD_C7.2 J3.21
N$26: EPD_C6.2 J3.18 J3.19
N$27: EPD_C10.2 J3.22
N$28: ERD_C11.2 J3.23
PREVGH: D5.1 EPD_C5.1 EPD_C6.1 EPD_C7.1 EPD_C8.1 EPD_C9.1 EPD_C9.2 EPD_C10.1 ERD_C11.1 ERD_C12.1
PREVGL: D4.2 ERD_C12.2 J3.24
RESE: J3.3 Q2.2 R3.2
RESE': R1.2 R3.1 SJ1.2
RESE'1: LED1.C R1_BAT.1 R1_BAT.2 U1.1
RESET: U2.3
RTC_RST: U2.16 U5.4
RX: TP2.TP U2.24
SCK: D9.1 J2.P5 J3.13 R8.1 TP8.TP U2.6 U6.6
SCL: J4.4 R1-PNH.1 U2.20 U3.4 U4.7 U5.16
SDA: J4.3 R2-PNH.1 U2.19 U3.3 U4.8 U5.15
SRC: C4.2 D5.2 L1.1 Q2.3
SS_SD: D12.1 J2.P2 R11.1 U2.4
TX: TP1.TP U2.25
USB_D+: D1.4 U2.14
USB_D-: D1.6 U2.13
VBAT: Q1.3 TP4.TP U4.2 U4.3
VBUS: C1_BAT.1 C2_BAT.1 LED1.A TP14.TP U1.3 U1.4
VRTC: C11.1 C12.1 R5.2 U5.14
VUSB: J1.A4 PFMF.050.1.1

## Tracks (layer width: path | path; a pad name or v marks a point on that pad's centre or on a via)
3V3  (via drill 0.35)
  Top 0.152: 83.91,47.44 83,48.36 81.32,48.36 62.88,29.92 58.92,29.92 57.7,28.7 57.7,28.39 J4.2 | 83.91,47.44 83.91,46.99 U5.2 83.91,47.44 | D6.2 101.89,26.57 101.89,29.61 107.38,35.1 R2-PINH1.2 107.38,35.25 106.92,35.71 | v103.72,38.91 103.72,41.35 R2_BAT1.2 | 106.92,35.71 v106.47,36.17 | 106.92,35.71 112.56,41.35 C1_BAT2.1 112.71,41.35 113.32,40.74 120.64,40.74 125.82,45.92 129.63,45.92 | 129.63,45.92 134.05,41.5 R2-PNH3.2 134.2,41.35 v138.01,41.35 | 129.63,45.92 129.63,49.73 131,51.1 131,52.17 130.85,52.32 129.78,52.32 129.17,51.71 C9.1 | v158.43,20.93 159.5,20.93 IC1.5 | v85.28,48.82 83.91,47.44 | 46.11,94.54 43.52,97.13 43.52,98.96 40.93,101.55 40.78,101.55 40.48,101.85 IC2.2 | R11.2 43.83,89.51 44.9,90.57 46.11,90.57 | 46.11,90.57 46.72,89.96 46.72,89.51 R10.2 48.25,89.51 57.39,80.36 | 57.39,80.36 59.98,77.77 59.98,74.11 62.73,71.37 63.79,71.37 64.4,71.98 R2-PNH2.2 | 46.11,90.57 46.11,94.54 | 46.11,94.54 TP16.TP | v61.66,84.48 64.4,87.22 R9.2 64.56,87.37 67.15,87.37 67.91,88.13 68.67,88.13 69.43,87.37 R8.2 69.58,87.37 75.99,93.77 77.05,93.77 77.81,93.01 77.81,90.42 74.77,87.37 R7.2 74.61,87.22 74.61,85.85 72.78,84.02 72.78,77.31 74.61,75.49 74.61,72.13 R2-PNH1.2 74.77,71.98 v74.77,71.07 | 57.39,80.36 v57.54,80.36 | C3.+ 28.59,10.56 11.67,27.48 11.67,38.15 Q3.3 11.52,38.3 v10.76,39.06 | v9.54,46.99 U2.2 | U6.8 50.53,61.92 50.53,60.86 U6.7 50.38,60.7 48.55,58.87 48.55,57.96 48.25,57.65 42.15,57.65 41.85,57.96 41.85,58.72 42.61,59.48 U6.3 | U6.3 42.76,59.64 43.22,59.64 44.29,60.7 44.29,73.35 42.3,75.33 42.3,79.91 42.15,80.06 41.24,80.06 39.71,78.53 33.77,78.53 33.47,78.84 33.47,79.91 26.61,86.76 26.61,89.51 R6.2 v25.39,90.57
  Top 0.152: 41.7,63.6 41.7,62.68 41.54,62.53 41.54,60.7 42.61,59.64 U6.3 | 41.7,63.6 R2-PINH2.2 | v14.42,95.15 5.73,95.15 J2.P4 | 41.7,63.6 v38.19,63.6
  Bottom 0.152: v106.47,36.17 v103.72,38.91 93.82,48.82 v85.28,48.82 84.21,48.82 74.77,58.26 v74.77,71.07 | v138.01,41.35 v158.43,20.93 | v61.66,84.48 v57.54,80.36 54.95,80.36 v38.19,63.6 24.02,49.43 16.24,49.43 13.81,46.99 v9.54,46.99 9.54,40.28 v10.76,39.06 | v14.42,95.15 14.87,95.15 19.44,90.57 v25.39,90.57
12C_PW  (via drill 0.35)
  Top 0.152: U3.2 31.48,18.49 30.57,18.49 29.81,17.73 28.74,17.73 U3.6 28.59,17.73 28.44,17.88 v27.52,17.88 | v27.52,19.25 28.59,19.25 U3.8 | C2.1 47.18,80.97 45.2,80.97 42.3,83.87 42.3,84.93 42,85.24 40.02,85.24 36.06,81.28 C1.1 35.9,81.12 35.6,80.82 v34.99,80.82 | v22.19,68.48 22.19,66.19 U2.17
  Bottom 0.152: v27.52,17.88 v27.52,19.25 13.04,19.25 7.1,25.19 7.1,51.41 19.14,63.45 19.14,65.43 v22.19,68.48 22.65,68.48 v34.99,80.82
12C_PW1  (via drill 0.35)
  Top 0.152: v71.72,83.26 72.02,82.95 72.02,82.34 C5.1 | v44.13,97.43 44.13,102 43.37,102.77 IC2.5
  Bottom 0.152: v71.72,83.26 65.32,83.26 64.71,82.65 64.1,82.65 62.27,84.48 62.27,84.78 49.62,97.43 v44.13,97.43
12C_PW3
  Top 0.152: BOOT_BUTTON.3 40.93,107.79 44.29,107.79 BOOT_BUTTON.4 44.44,107.64 44.44,98.04 56.78,85.7 56.78,82.34 C8.1 56.94,82.19 63.18,75.94 63.18,72.13 R2-PNH2.1
32KHZ  (via drill 0.35)
  Top 0.152: v104.94,35.25 106.16,35.25 R2-PINH1.1 | v95.34,44.85 83,44.85 82.69,45.16 82.69,46.83 U5.1 82.69,46.99 v80.86,46.99 | v77.51,50.34 19.75,50.34 18.53,49.12 18.53,48.82 U2.9
  Bottom 0.152: v95.34,44.85 v104.94,35.25 | v80.86,46.99 v77.51,50.34
DN
  Top 0.152: J1.A7 165.29,53.84 165.29,54.15 J1.B6
DP
  Top 0.152: J1.B7 165.29,52.78 165.29,53.24 J1.A6
EPD_3V3  (via drill 0.35)  (1 unrouted)
  Top 0.152: v115.3,25.96 115.3,22.76 EPD_C5.2 | v107.84,48.66 107.84,51.25 107.53,51.56 C7.1 | J3.16 37.73,27.17 J3.15 | 27.37,29.77 35.14,29.77 37.28,27.63 J3.16 | 27.37,29.77 20.97,29.77 14.72,36.01 12.74,36.01 Q3.2 | J3.16 | v38.34,93.93 38.95,94.54 39.71,94.54 TP17.TP | v27.83,60.55 27.83,56.13 v31.33,52.63 32.4,51.56 v38.8,51.56 | v31.33,39.21 27.37,35.25 27.37,29.77 | v90.77,43.63 87.87,43.63 87.26,43.02 v78.42,43.02
  Bottom 0.152: 115.3,31.9 115.3,41.2 v107.84,48.66 | 115.3,31.9 v115.3,25.96 | v38.34,93.93 38.34,79.6 27.83,69.08 v27.83,60.55 | v31.33,39.21 v31.33,52.63 | 115.3,31.9 107.23,31.9 94.27,44.85 91.99,44.85 v90.77,43.63 | v78.42,43.02 53.58,43.02 42.15,54.45 41.54,54.45 40.63,53.54 40.63,53.39 v38.8,51.56
EPD_3V3_C  (via drill 0.35)
  Top 0.152: v10.15,37.54 10.61,37.08 10.61,36.17 Q3.1 | v20.82,64.21 20.82,66.04 U2.18 20.97,66.19 20.97,68.17 21.88,69.08 23.41,69.08 38.8,53.69 v40.02,53.69 | v35.45,82.34 35.45,89.51 R2.1 | v58.15,54.76 62.57,59.18 127.8,59.18 129.78,57.2 129.78,56.28 128.87,55.37 120.79,55.37 119.57,56.59 115.76,56.59 TP13.TP
  Bottom 0.152: v10.15,37.54 7.71,39.98 7.71,51.1 v20.82,64.21 35.6,78.99 35.6,81.12 35.45,81.28 v35.45,82.34 | v58.15,54.76 41.09,54.76 v40.02,53.69
EPD_BUSY  (via drill 0.35)
  Top 0.152: v40.93,29.46 40.78,29.31 J3.9 | v44.44,25.96 44.44,25.04 47.94,21.54 v53.13,21.54 | v104.64,14.98 105.7,13.92 TP9.TP | v10.76,59.94 10.76,66.04 U2.26
  Bottom 0.152: v40.93,29.46 37.89,29.46 37.12,28.7 37.12,28.09 39.26,25.96 v44.44,25.96 | v104.64,14.98 59.98,14.98 53.43,21.54 v53.13,21.54 52.97,21.69 45.51,21.69 44.59,22.6 38.19,22.6 32.4,16.81 32.4,16.05 24.63,8.28 14.26,8.28 6.03,16.51 6.03,50.8 10.76,55.52 v10.76,59.94
EPD_CS  (via drill 0.35)
  Top 0.152: 39.41,33.73 39.41,35.25 v27.37,47.29 22.04,47.29 20.97,48.36 U2.11 | 39.41,33.73 39.41,30.07 39.26,29.92 39.26,27.17 J3.12 | v47.94,68.93 47.94,81.43 45.51,83.87 45.51,89.51 R10.1 | v78.27,26.57 85.89,18.95 D11.1 | 39.41,33.73 v42.15,33.73 | v92.9,33.73 92.9,36.93 104.33,48.36 104.33,52.17 104.18,52.32 103.26,52.32 103.11,52.17 103.11,51.1 102.96,50.95 101.89,50.95 101.74,51.1 101.74,52.93 107.07,58.26 122.31,58.26 123.84,56.74 128.41,56.74 TP10.TP
  Bottom 0.152: v47.94,68.93 47.49,68.93 38.19,59.64 37.28,59.64 27.37,49.73 v27.37,47.29 | v42.15,33.73 63.49,33.73 70.65,26.57 v78.27,26.57 85.43,33.73 v92.9,33.73
EPD_DC  (via drill 0.35)
  Top 0.152: v30.57,46.22 42.76,34.03 42.76,33.42 39.87,30.53 39.87,27.17 J3.11 | v17.92,46.38 15.03,46.38 13.35,48.05 U2.5 13.2,48.82 15.94,51.56 15.94,57.65 14.11,59.48 14.11,60.4 v14.72,61.01 | v33.31,87.37 33.31,94.54 TP11.TP
  Bottom 0.152: v30.57,46.22 19.75,46.22 19.6,46.38 v17.92,46.38 | v33.31,87.37 14.72,68.78 v14.72,61.01
EPD_RST  (via drill 0.35)
  Top 0.152: v30.57,47.14 43.07,34.64 43.07,33.27 40.32,30.53 40.32,27.17 J3.10 | v30.57,52.02 30.57,52.32 17.16,65.73 17.16,66.04 U2.21 | v120.33,56.74 122.01,56.74 TP12.TP | v88.02,58.26 87.57,58.26 87.42,58.42 83.15,58.42 78.12,53.39 78.12,50.03 77.2,49.12 30.87,49.12 v30.57,49.43
  Bottom 0.152: v30.57,52.02 v30.57,49.43 v30.57,47.14 | v120.33,56.74 117.74,56.74 116.22,58.26 v88.02,58.26
FLASH_CS  (via drill 0.35)
  Top 0.152: v70.19,89.05 65.01,89.05 63.34,87.37 R9.1 | v43.68,61.01 42.76,61.92 U6.1 | v95.19,16.2 95.34,16.35 95.34,17.42 95.04,17.73 94.73,17.73 93.66,18.79 D10.1 | v35.14,49.73 34.84,50.03 23.25,50.03 22.34,49.12 22.34,48.82 U2.12
  Bottom 0.152: v70.19,89.05 70.5,89.05 73.85,85.7 73.85,80.67 62.88,69.69 | 62.88,69.69 51.75,58.57 46.11,58.57 45.05,59.64 | v43.68,61.01 45.05,59.64 | v95.19,16.2 103.42,16.2 105.86,18.64 105.86,27.63 85.28,48.21 84.37,48.21 62.88,69.69 | 45.05,59.64 v35.14,49.73
GDR  (via drill 0.35)
  Top 0.152: v81.47,52.47 77.81,48.82 74.46,48.82 71.57,45.92 62.57,45.92 v55.72,39.06 44.29,27.63 44.29,27.17 J3.2 | v114.69,32.51 118.66,28.55 Q2.1 | v31.48,83.26 31.48,89.51 R4.2 | v29.66,76.4 29.66,65.12 v42.46,52.32
  Bottom 0.152: v81.47,52.47 94.73,52.47 v114.69,32.51 | v31.48,83.26 31.48,78.23 v29.66,76.4 | v55.72,39.06 v42.46,52.32
GND  (via drill 0.35)  (4 unrouted)
  Top 0.152: D11.2 87.57,18.95 92.44,18.95 93.21,19.71 94.27,19.71 95.04,18.95 D10.2 95.19,18.79 95.8,18.79 | 102.66,18.03 102.66,15.44 101.13,13.92 SJ1.1 | 102.66,18.03 102.66,18.79 D9.2 | 102.66,18.03 109.51,18.03 110.28,18.79 D8.2 110.43,18.79 111.19,18.03 117.13,18.03 117.9,18.79 D7.2 118.05,18.95 118.66,18.95 v119.11,19.4 | 95.8,18.79 97.17,18.79 97.93,18.03 102.66,18.03 | C1_BAT2.2 113.93,41.5 117.59,41.5 122.62,46.53 C1_BAT.2 122.77,46.68 125.36,46.68 128.72,50.03 | 128.72,50.03 130.24,51.56 C9.2 | 113.93,49.27 113.93,50.49 115,51.56 C12.2 | 113.93,49.27 113.93,46.68 C2_BAT.2 113.78,46.53 113.02,45.77 112.1,45.77 108.9,48.97 108.9,51.56 C7.2 | 113.93,49.27 121.71,49.27 122.77,50.34 122.77,51.56 C10.2 122.77,51.71 v127.04,51.71 127.5,51.71 133.29,57.5 136.49,57.5 145.78,48.21 | 155.69,29.46 157.52,27.63 157.52,20.47 157.37,20.32 157.21,20.32 156.91,20.01 IC1.2 | 155.69,29.46 152.03,29.46 151.42,28.85 D3.1 | 169.71,48.51 165.9,48.51 J1.MP3 165.75,48.36 155.69,38.3 | J1.MP4 165.9,58.72 169.71,58.72 J1.MP2 169.71,58.57 169.71,48.51 | 169.71,48.51 J1.MP1 | 155.69,38.3 155.69,29.46 | 155.69,38.3 145.78,48.21 | 145.78,48.21 138.32,40.74 131.15,40.74 130.54,41.35 124.14,41.35 C1_BAT1.2 123.99,41.35 122.16,39.52 119.57,39.52 115.76,35.71 115.76,31.9 117.44,30.22 119.57,30.22 122.92,26.87 122.92,22.76 EPD_C2.1 122.92,22.6 121.25,20.93 v120.33,20.93 | v127.95,50.8 128.72,50.03 | J3.MP1 45.81,24.74 v46.57,24.74 50.38,24.74 53.89,28.24 56.48,28.24 J4.1 56.63,28.39 56.63,28.7 58.15,30.22 61.96,30.22 86.5,54.76 86.5,56.13 U5.13 | 37.12,26.41 36.82,26.72 36.82,27.02 J3.17
  Top 0.152: 37.12,26.41 40.93,26.41 41.24,26.72 41.24,27.02 J3.8 41.39,27.17 41.39,29 43.07,30.68 43.07,32.81 44.59,34.34 44.59,39.52 46.57,41.5 EPD_C1.1 46.72,41.65 47.33,42.26 48.55,42.26 48.71,42.11 48.71,41.04 47.03,39.37 45.35,39.37 45.2,39.21 45.2,38.3 45.66,37.84 45.96,37.84 D1.5 | J3.MP2 32.25,24.58 32.25,20.01 31.64,19.4 U3.1 31.48,19.25 30.87,19.25 30.27,18.64 28.74,18.64 U3.7 28.59,18.49 27.22,18.49 26.91,18.18 26.91,17.57 27.52,16.96 28.59,16.96 U3.5 28.74,16.81 31.64,13.92 | C11.2 24.93,25.65 31.33,25.65 32.25,24.74 J3.MP2 | 31.64,13.92 31.64,10.56 C3.- 31.64,10.41 31.03,10.41 29.35,8.73 15.48,8.73 U4.6 15.33,8.73 14.26,8.73 | 14.26,8.73 14.26,8.89 U4.9 | 14.26,8.73 14.26,8.58 13.96,8.28 13.5,8.28 U4.4 | 14.26,8.73 U4.9 | U4.9 14.26,9.04 14.26,9.34 13.96,9.65 13.5,9.65 U4.1 13.35,9.8 13.35,11.63 7.41,17.57 7.41,18.03 U1.2 7.41,18.18 7.41,21.08 9.08,22.76 9.08,25.65 R1_PWRUSB.1 9.23,25.8 v9.23,39.37 | v37.12,26.11 37.12,26.41 | v33.01,24.89 32.55,24.89 32.4,24.74 J3.MP2 | 48.55,68.32 48.55,62.23 46.57,60.25 U6.9 46.42,60.09 44.59,58.26 42.76,58.26 U6.4 | 48.55,68.32 48.55,80.82 C2.2 48.55,80.97 48.55,86.61 46.11,89.05 46.11,90.12 45.96,90.27 45.05,90.27 43.52,88.74 41.24,88.74 41.09,88.9 41.09,90.27 37.73,93.62 37.73,96.82 | U2.29_6 14.11,57.2 15.18,57.2 U2.29_9 | U2.29_8 15.33,55.83 15.33,54.76 U2.29_7 15.18,54.76 14.11,54.76 U2.29_4 13.96,54.76 13.96,55.83 U2.29_5 13.96,55.98 13.96,57.05 U2.29_6 | U2.29_3 12.74,57.05 12.74,55.98 U2.29_2 12.74,55.83 12.74,54.76 U2.29_1 12.59,54.61 8.32,50.34 8.32,48.82 U2.1 8.32,48.66 v8.32,47.29
  Top 0.152: U2.29_3 12.59,57.2 8.32,61.46 8.32,66.04 U2.28 8.32,66.19 8.32,82.19 16.24,90.12 J2.G1 16.4,90.27 20.97,90.27 26.61,95.91 28.89,95.91 30.11,94.69 30.11,89.51 R4.1 30.27,89.51 30.27,83.56 34.38,79.45 | U2.29_6 13.96,57.2 12.74,57.2 U2.29_3 | 42.91,81.12 42.91,82.8 41.7,84.02 41.7,84.32 R2_BAT.1 | 42.91,81.12 42.91,79.45 C4_USB.2 43.07,79.3 44.59,77.77 44.59,71.37 47.64,68.32 48.55,68.32 | 34.38,79.45 35.45,79.45 37.12,81.12 C1.2 37.28,81.12 42.91,81.12 | 34.38,79.45 34.23,79.45 C5_USB.2 34.38,79.45 | R2USB1.1 77.05,77.16 73.39,80.82 73.39,82.19 C5.2 73.39,82.34 73.39,84.17 78.12,88.9 78.12,93.16 77.2,94.08 73.24,94.08 71.57,92.4 TP3.TP 71.41,92.25 68.82,92.25 66.69,90.12 61.51,90.12 61.2,90.42 | R2USB2.1 68.21,77.16 65.77,79.6 65.77,82.19 C6.2 65.62,82.34 65.62,82.95 64.71,83.87 58.15,83.87 | 58.15,83.87 58.15,87.22 R1.1 58.15,87.37 61.2,90.42 | 58.15,83.87 58.15,82.34 C8.2 | 61.2,90.42 61.2,92.25 TP5.TP 61.2,92.4 61.2,103.37 55.41,109.17 CHANGE_BUTTON.1 55.26,109.17 51.91,109.17 CHANGE_BUTTON.2 51.75,109.32 44.44,109.32 BOOT_BUTTON.1 44.29,109.32 40.93,109.32 BOOT_BUTTON.2 40.78,109.32 24.78,109.32 RESET_BUTTON.1 24.63,109.47 21.27,109.47 RESET_BUTTON.2 21.12,109.32 18.68,109.32 13.5,104.14 D12.2 13.5,103.98 13.5,103.37 17.31,99.56 17.31,96.82 | 5.27,97.58 5.58,97.58 J2.P6 | 5.27,97.58 3.14,99.72 3.14,100.17 J2.G4 | 5.27,97.58 2.07,94.38 2.07,87.22 J2.G3 | 5.27,97.58 J2.P6 | 37.73,96.82 40.48,99.56 40.48,100.78 IC2.3 | 17.31,96.82 37.73,96.82 | 16.4,95.91 17.31,96.82 | 16.4,95.91 14.87,97.43 5.73,97.43 J2.P6 | 16.4,95.91 J2.G2 | 95.8,18.79 95.8,15.9 93.82,13.92 31.64,13.92
  Bottom 0.152: v127.04,51.71 v127.95,50.8 | v119.11,19.4 119.11,19.71 v120.33,20.93 | v33.01,24.89 34.23,26.11 v37.12,26.11 38.49,24.74 v46.57,24.74 | v9.23,39.37 9.23,46.38 v8.32,47.29
GPIO8  (via drill 0.35)
  Top 0.152: v95.95,34.95 102.35,41.35 R2_BAT1.1 | v30.27,45.31 v35.14,40.43 | v19.29,45.77 19.29,48.36 19.6,48.66 U2.10
  Bottom 0.152: v95.95,34.95 88.63,34.95 88.33,34.64 40.93,34.64 v35.14,40.43 | v30.27,45.31 19.75,45.31 v19.29,45.77
INT_RTC  (via drill 0.35)
  Top 0.152: 93.66,55.83 85.28,47.44 85.28,46.99 U5.3 | 93.66,55.83 94.43,56.59 102.96,56.59 TP15.TP | v40.32,72.13 40.32,74.27 R2-PINH2.1 | U2.8 17.01,48.82 v18.23,50.03 18.84,50.64 54.95,50.64 63.18,58.87 90.62,58.87 93.66,55.83
  Bottom 0.152: v18.23,50.03 v40.32,72.13
MISO  (via drill 0.35)
  Top 0.152: U6.2 42.61,60.86 41.85,61.62 41.85,62.38 42.3,62.84 42.3,74.88 42.15,75.03 34.84,75.03 25.24,84.63 25.24,89.51 R6.1 25.08,89.51 v23.41,91.18 | v11.98,98.5 5.88,98.5 J2.P7 | v9.54,82.5 9.54,66.19 U2.27 | v115.46,19.4 115.91,18.95 116.37,18.95 D7.1 | v58.15,92.25 56.33,92.25 TP6.TP
  Bottom 0.152: 14.11,96.36 19.29,91.18 v23.41,91.18 | 14.11,96.36 13.5,96.97 | 13.5,96.97 v11.98,98.5 | v9.54,82.5 9.54,83.56 12.13,86.15 12.13,95.6 13.5,96.97 | v115.46,19.4 115.46,23.06 120.64,28.24 120.64,36.78 106.31,51.1 96.56,51.1 93.82,53.84 84.98,53.84 75.38,63.45 75.38,84.78 67.91,92.25 v58.15,92.25 49.62,100.78 18.53,100.78 14.11,96.36
MOSI  (via drill 0.35)
  Top 0.152: v73.24,85.39 73.24,87.22 R7.1 | v51.45,59.18 50.53,58.26 U6.5 | TP7.TP 116.07,13.92 119.72,17.57 119.72,19.71 119.42,20.01 109.97,20.01 108.9,18.95 D8.1 108.75,18.95 v103.87,18.95 | v30.87,34.95 37.89,27.94 | 37.89,27.94 38.19,27.63 38.19,27.17 J3.14 | v15.94,46.99 15.94,48.66 U2.7 15.94,48.82 16.24,49.12 16.24,57.81 14.72,59.33 v14.72,59.94 | v7.41,93.77 7.1,94.08 5.88,94.08 J2.P3 | 37.89,27.94 v38.19,28.24
  Bottom 0.152: v73.24,85.39 73.24,80.97 v51.45,59.18 46.42,59.18 43.98,61.62 43.37,61.62 34.53,52.78 34.53,35.25 34.23,34.95 v30.87,34.95 27.98,34.95 v15.94,46.99 | v7.41,93.77 7.41,67.26 v14.72,59.94 | v103.87,18.95 99.3,18.95 95.04,23.21 50.84,23.21 45.81,28.24 v38.19,28.24
N$2
  Top 0.152: R2USB1.2 78.58,77.01 78.58,71.22 87.42,62.38 87.42,61.31 88.33,60.4 156.45,60.4 164.53,52.32 165.14,52.32 J1.A5
N$5  (via drill 0.35)
  Top 0.152: v71.72,77.01 69.58,77.01 R2USB2.2 | v74.77,77.01 76.14,77.01 76.75,76.4 77.66,76.4 77.81,76.55 77.81,77.77 77.97,77.92 78.88,77.92 87.72,69.08 87.72,61.46 88.48,60.7 135.12,60.7 138.77,64.36 155.54,64.36 164.53,55.37 165.14,55.37 J1.B5
  Bottom 0.152: v74.77,77.01 v71.72,77.01
N$10
  Top 0.152: C5_USB.1 32.86,79.3 32.86,78.99 33.62,78.23 40.48,78.23 41.54,79.3 C4_USB.1
N$11  (via drill 0.35)
  Top 0.152: 156,20.32 156,19.55 156.45,19.1 156.76,19.1 IC1.3 | 156,20.32 156.45,20.77 156.76,20.77 IC1.1 | v26,36.01 17.77,36.01 Q1.2 | v105.25,27.33 106.01,26.57 D2.1 106.16,26.57 106.77,27.17 108.75,27.17 109.36,26.57 119.42,26.57 119.57,26.72 | 119.57,26.72 119.57,27.48 119.42,27.63 118.35,27.63 114.09,31.9 114.09,34.95 118.96,39.82 120.18,39.82 121.71,41.35 122.62,41.35 C1_BAT1.1 | 156,20.32 151.58,24.74 v123.53,24.74 | 119.57,26.72 v121.55,24.74
  Bottom 0.152: v26,36.01 26.46,36.01 28.13,34.34 98.24,34.34 v105.25,27.33 | v121.55,24.74 v123.53,24.74
N$12  (via drill 0.35)
  Top 0.152: Q1.1 15.79,36.17 12.28,39.67 10.45,39.67 9.54,38.76 9.54,36.01 10.45,35.1 10.45,25.8 R1_PWRUSB.2 10.61,25.8 26.61,9.8 v27.06,9.8 | v46.27,19.55 70.19,19.55 86.81,36.17 88.48,36.17 91.99,32.66 91.99,32.51 99,25.5 106.31,25.5 107.23,26.41 108.14,26.41 D2.2
  Bottom 0.152: v46.27,19.55 45.66,18.95 45.66,17.57 45.81,17.42 45.81,16.81 38.8,9.8 v27.06,9.8
N$13
  Top 0.152: R2_BAT.2 42.91,84.48 42.91,85.85 34.68,94.08 34.68,95.15 33.62,96.21 21.43,96.21 16.55,91.34 15.48,91.34 6.95,82.8 6.95,22.3 6.34,21.69 6.34,20.77 U1.5
N$14
  Top 0.152: C4.1 116.52,35.25 117.13,35.86 134.2,35.86 141.21,28.85 D4.1 141.36,28.7 141.97,28.09 152.03,28.09 152.64,28.7 154.78,28.7 D3.2
N$15
  Top 0.152: J3.4 43.37,27.17 43.37,32.66 44.9,34.19 44.9,39.37 46.42,40.89 47.33,40.89 47.94,41.5 EPD_C1.2
N$16  (via drill 0.35)
  Top 0.152: v46.27,18.64 42.76,22.15 42.76,27.02 J3.5 | v124.75,16.35 124.75,22.15 124.3,22.6 EPD_C2.2
  Bottom 0.152: v46.27,18.64 51.3,18.64 56.94,13 121.4,13 v124.75,16.35
N$17  (via drill 0.35)
  Top 0.152: R2-PNH1.1 73.24,72.13 72.02,72.13 64.56,79.6 64.56,82.19 C6.1 64.4,82.34 v64.4,83.26 | 39.71,102.92 33.01,102.92 28.74,107.18 22.04,107.18 21.27,107.95 RESET_BUTTON.3 | 39.71,102.92 40.32,102.92 IC2.1 | v39.87,99.87 39.87,100.33 39.71,100.48 39.71,102.92
  Bottom 0.152: v64.4,83.26 64.4,84.63 49.16,99.87 v39.87,99.87
N$18  (via drill 0.35)
  Top 0.152: CHANGE_BUTTON.3 51.91,107.79 55.26,107.79 CHANGE_BUTTON.4 55.41,107.64 v60.59,102.46 | v122.16,50.64 121.55,51.25 121.55,51.56 C10.1 121.4,51.71 v117.13,55.98 | v131.31,41.5 132.83,41.5 R2-PNH3.1
  Bottom 0.152: v131.31,41.5 v122.16,50.64 | v60.59,102.46 84.67,78.38 84.67,59.33 88.02,55.98 v117.13,55.98
N$21
  Top 0.152: D6.1 99.76,26.57 99.76,31.44 114.09,45.77 115.3,45.77 118.5,48.97 125.21,48.97 132.83,56.59 134.05,56.59 R5.1
N$24
  Top 0.152: J3.20 35.29,27.02 35.29,26.11 43.37,18.03 86.5,18.03 86.81,18.34 86.81,20.77 88.63,22.6 EPD_C8.2
N$25  (via drill 0.35)
  Top 0.152: v93.82,17.73 42.61,17.73 34.84,25.5 34.84,27.02 J3.21 | v96.71,20.62 96.71,21.84 97.47,22.6 EPD_C7.2
  Bottom 0.152: v96.71,20.62 v93.82,17.73
N$26  (via drill 0.35)
  Top 0.152: J3.19 35.9,27.17 36.21,27.17 J3.18 36.36,27.02 36.36,25.96 v41.54,20.77 | v97.47,19.86 97.93,20.32 104.18,20.32 106.47,22.6 EPD_C6.2 | v45.2,17.12 v94.73,17.12
  Bottom 0.152: v94.73,17.12 v97.47,19.86 | v41.54,20.77 v45.2,17.12
N$27  (via drill 0.35)
  Top 0.152: v33.92,28.24 34.23,27.94 34.23,27.17 J3.22 | v32.55,25.8 33.01,25.8 v37.89,20.93 | v150.51,22.76 150.51,23.06 151.12,23.67 EPD_C10.2
  Bottom 0.152: v33.92,28.24 33.16,28.24 31.94,27.02 31.94,26.41 v32.55,25.8 | v37.89,20.93 40.17,20.93 40.63,21.38 49.01,21.38 57.09,13.31 120.79,13.31 130.24,22.76 v150.51,22.76
N$28  (via drill 0.35)
  Top 0.152: v47.33,16.2 43.52,16.2 33.77,25.96 33.77,27.02 J3.23 | v129.93,20.93 130.39,20.93 133.9,24.43 140.45,24.43 141.06,23.82 ERD_C11.2
  Bottom 0.152: v47.33,16.2 47.79,16.2 52.06,11.93 102.2,11.93 102.81,11.33 120.64,11.33 129.93,20.62 v129.93,20.93
PREVGH  (via drill 0.35)
  Top 0.152: v41.85,53.84 30.27,65.43 30.27,74.27 ERD_C12.1 | v45.96,47.6 46.88,46.68 D5.1 | EPD_C9.2 160.11,27.63 158.89,27.63 EPD_C9.1 158.74,27.48 158.74,22.45 157.82,21.54 157.82,18.79 157.37,18.34 154.01,18.34 149.29,23.06 | 149.29,23.06 140.45,23.06 139.84,23.67 ERD_C11.1 139.69,23.67 133.59,23.67 125.67,15.74 124.45,15.74 120.94,19.25 120.94,19.4 118.35,21.99 114.69,21.99 114.09,22.6 EPD_C5.1 113.93,22.76 113.32,23.36 105.86,23.36 105.25,22.76 EPD_C6.1 105.09,22.76 98.69,22.76 98.08,23.36 97.02,23.36 96.41,22.76 EPD_C7.1 96.25,22.76 91.68,27.33 91.68,32.51 88.33,35.86 87.72,35.86 87.42,35.56 | 149.29,23.06 149.9,23.67 EPD_C10.1 | 87.42,35.56 87.42,22.76 EPD_C8.1 | 87.42,35.56 v87.11,35.56
  Bottom 0.152: v41.85,53.84 41.85,51.71 v45.96,47.6 46.27,47.6 58.31,35.56 v87.11,35.56
PREVGL  (via drill 0.35)
  Top 0.152: v33.31,29.16 33.31,27.17 J3.24 | v33.31,40.43 v33.31,33.42 | ERD_C12.2 31.64,74.27 37.58,68.32 v37.58,59.03 39.26,57.35 v50.99,57.35 | v144.72,44.7 144.72,28.85 D4.2 | v63.18,59.79 v131.31,59.79
  Bottom 0.152: v33.31,33.42 v33.31,29.16 | v33.31,40.43 33.31,54.76 v37.58,59.03 | v144.72,44.7 144.72,46.38 v131.31,59.79 | v63.18,59.79 53.43,59.79 v50.99,57.35
RESE
  Top 0.152: 87.72,37.54 94.43,44.24 96.71,44.24 103.57,51.1 103.57,51.56 R3.2 | 87.72,37.54 71.11,20.93 48.1,20.93 43.83,25.19 43.83,27.02 J3.3 | 87.72,37.54 92.29,32.97 92.29,32.66 99.15,25.8 102.35,25.8 104.48,27.94 108.45,27.94 109.21,27.17 118.66,27.17 Q2.2
RESE'  (via drill 0.35)
  Top 0.152: v71.26,89.96 71.11,89.81 64.56,89.81 62.12,87.37 59.53,87.37 R1.2 | R3.1 102.35,51.71 v102.35,52.63 107.68,57.96 111.04,57.96 119.11,49.88 v120.33,49.88 | v104.18,13.92 102.81,13.92 SJ1.2
  Bottom 0.152: v71.26,89.96 71.26,89.51 84.37,76.4 84.37,59.18 88.79,54.76 100.22,54.76 v102.35,52.63 | v104.18,13.92 115,13.92 124.14,23.06 124.14,46.07 v120.33,49.88
RESE'1  (via drill 0.35)
  Top 0.152: R1_BAT.2 104.94,46.53 103.72,46.53 R1_BAT.1 103.57,46.53 103.57,43.79 93.82,34.03 v93.82,33.73 | v47.49,22.91 49.47,22.91 51.75,25.19 52.97,25.19 LED1.C 53.13,25.35 v54.04,25.35 | v7.25,16.81 6.34,17.73 6.34,18.03 U1.1
  Bottom 0.152: v47.49,22.91 38.04,22.91 31.18,16.05 31.18,15.59 24.78,9.19 14.87,9.19 v7.25,16.81 | v93.82,33.73 85.43,25.35 v54.04,25.35
RTC_RST  (via drill 0.35)
  Top 0.152: v53.28,51.71 40.78,51.71 40.32,52.17 37.12,52.17 23.56,65.73 23.56,66.04 U2.16 | v83.3,45.46 85.43,45.46 86.5,46.53 86.5,46.83 U5.4
  Bottom 0.152: v53.28,51.71 77.05,51.71 v83.3,45.46
RX
  Top 0.152: U2.24 13.35,66.04 13.81,65.58 13.81,65.43 28.28,50.95 53.43,50.95 74,71.52 74,75.64 71.11,78.53 71.11,86.92 76.44,92.25 TP2.TP
SCK  (via drill 0.35)
  Top 0.152: v33.92,35.56 37.28,35.56 39.1,33.73 39.1,33.12 38.8,32.81 38.8,27.17 J3.13 | v15.03,47.29 15.03,48.36 14.72,48.66 U2.6 | TP8.TP 111.04,13.76 112.26,12.54 116.52,12.54 120.64,16.66 120.64,19.25 119.57,20.32 109.82,20.32 109.51,20.01 102.35,20.01 101.28,18.95 D9.1 101.13,18.95 97.47,18.95 88.02,28.39 v88.02,35.25 | v68.21,79.3 68.21,87.22 R8.1 | 51.45,60.55 v51.45,62.53 | 51.45,60.55 50.53,59.64 U6.6 | v15.03,96.36 J2.P5 | 51.45,60.55 v53.28,58.72
  Bottom 0.152: v15.03,47.29 15.33,47.6 16.24,47.6 16.55,47.29 16.55,46.83 27.83,35.56 v33.92,35.56 33.92,52.63 43.83,62.53 v51.45,62.53 v68.21,79.3 69.13,79.3 72.63,82.8 72.63,85.39 66.69,91.34 58.15,91.34 49.01,100.48 39.56,100.48 35.45,96.36 v15.03,96.36 | v88.02,35.25 88.02,41.65 70.96,58.72 v53.28,58.72
SCL  (via drill 0.35)
  Top 0.152: v25.08,10.41 23.86,9.19 15.48,9.19 U4.7 | v30.57,15.9 31.48,16.81 U3.4 | v54.95,22.15 59.53,26.72 59.53,28.24 J4.4 59.68,28.39 62.88,28.39 78.12,43.63 v86.96,43.63 | 59.53,75.49 59.53,72.13 v66.54,65.12 | 59.53,75.49 59.53,77.01 R1-PNH.1 | v78.73,52.93 79.34,52.93 U5.16 | v29.05,69.39 21.27,69.39 18.53,66.65 18.53,66.19 U2.20 | 59.53,75.49 v49.16,75.49
  Bottom 0.152: v25.08,10.41 v30.57,15.9 31.03,16.35 31.03,17.73 37.43,24.13 43.98,24.13 44.59,23.52 48.25,23.52 49.32,22.45 54.34,22.45 54.65,22.15 v54.95,22.15 | v66.54,65.12 v78.73,52.93 86.96,44.7 v86.96,43.63 | v29.05,69.39 36.67,69.39 42.76,75.49 v49.16,75.49
SDA  (via drill 0.35)
  Top 0.152: v130.7,53.54 131.31,52.93 131.31,50.19 130.39,49.27 130.39,46.68 R2-PNH.1 | v87.11,57.81 85.13,57.81 84.06,56.74 84.06,56.28 U5.15 83.91,56.13 83.91,52.63 62.12,30.83 v61.66,30.83 | v23.41,9.8 15.48,9.8 U4.8 | v30.42,16.81 31.18,17.57 31.48,17.57 U3.3 | v47.33,24.13 50.23,24.13 52.06,25.96 56.63,25.96 58.46,27.78 58.46,28.24 J4.3 58.61,28.39 58.61,28.7 59.22,29.31 v60.29,29.31 | v19.75,64.06 19.75,66.04 U2.19
  Bottom 0.152: v130.7,53.54 120.49,53.54 116.37,57.65 87.26,57.65 v87.11,57.81 | v23.41,9.8 v30.42,16.81 30.42,17.57 | v47.33,24.13 44.44,24.13 44.13,24.43 37.28,24.43 30.42,17.57 | v19.75,64.06 19.75,63.6 7.41,51.25 7.41,25.35 12.89,19.86 28.13,19.86 30.42,17.57 | v61.66,30.83 60.29,29.46 v60.29,29.31
SRC  (via drill 0.35)  (1 unrouted)
  Top 0.152: v117.74,30.83 117.74,35.1 C4.2 | v120.03,28.55 120.79,27.78 Q2.3 | v71.26,46.53 50.53,46.53 D5.2 | v93.51,44.24 v82.69,44.24
  Bottom 0.152: v120.03,28.55 119.42,29.16 | 119.42,29.16 v117.74,30.83 | v71.26,46.53 80.4,46.53 v82.69,44.24 | v93.51,44.24 94.43,44.24 113.32,25.35 115.61,25.35 119.42,29.16
SS_SD  (via drill 0.35)
  Top 0.152: R11.1 40.32,89.51 40.32,89.96 33.77,96.52 18.84,96.52 16.55,94.23 v11.37,94.23 8.78,94.23 7.71,93.16 6.34,93.16 J2.P2 | v11.98,99.41 11.98,103.98 D12.1 | v11.37,86.31 7.56,82.5 7.56,47.14 8.32,46.38 10.15,46.38 11.98,48.21 11.98,48.66 U2.4
  Bottom 0.152: v11.98,99.41 11.37,98.8 v11.37,94.23 v11.37,86.31
TX
  Top 0.152: U2.25 12.13,66.19 12.13,80.97 25.69,94.54 28.28,94.54 TP1.TP
USB_D+
  Top 0.152: D1.4 46.11,36.93 46.57,36.93 49.62,39.98 49.62,42.72 46.42,45.92 33.16,45.92 30.42,48.66 U2.14
USB_D-
  Top 0.152: D1.6 46.11,38.76 46.88,38.76 49.01,40.89 49.01,42.26 45.66,45.62 33.01,45.62 30.72,47.9 25.54,47.9 25.24,47.6 24.32,47.6 23.56,48.36 23.56,48.66 U2.13
VBAT  (via drill 0.35)
  Top 0.152: U4.3 13.5,8.73 13.5,9.19 U4.2 13.35,9.34 12.89,9.34 5.73,16.51 5.73,18.79 6.95,20.01 6.95,21.84 7.25,22.15 7.25,38.3 8.93,39.98 12.43,39.98 14.11,38.3 16.7,38.3 Q1.3 16.85,38.3 21.58,43.02 v21.58,46.83 | v66.38,90.73 66.38,92.25 TP4.TP
  Bottom 0.152: v66.38,90.73 66.38,89.51 72.33,83.56 72.33,82.95 69.28,79.91 58,79.91 38.04,59.94 34.99,59.94 21.88,46.83 v21.58,46.83
VBUS  (via drill 0.35)
  Top 0.152: C2_BAT.1 112.56,46.68 v112.56,47.6 112.56,53.54 109.51,56.59 TP14.TP | C1_BAT.1 121.4,46.68 v117.13,46.68 116.68,46.68 112.26,42.26 111.04,42.26 100.37,31.59 v100.37,31.14 | v51.3,23.82 52.97,23.82 LED1.A | v10.61,23.06 8.32,20.77 U1.4 8.32,20.62 8.32,18.18 U1.3
  Bottom 0.152: v117.13,46.68 113.48,46.68 v112.56,47.6 | v10.61,23.06 21.58,34.03 40.48,34.03 50.69,23.82 v51.3,23.82 84.37,23.82 91.68,31.14 v100.37,31.14
VRTC  (via drill 0.35)
  Top 0.152: v115.15,52.93 113.93,51.71 C12.1 | v134.51,55.67 135.42,56.59 R5.2 | v32.55,26.72 24.02,26.72 23.1,25.8 22.8,25.8 C11.1 | v85.28,54.45 85.28,56.13 U5.14
  Bottom 0.152: 119.72,52.93 131.76,52.93 v134.51,55.67 | 119.72,52.93 v115.15,52.93 113.63,51.41 102.05,51.41 99,54.45 v85.28,54.45 | v32.55,26.72 38.04,26.72 39.41,25.35 48.25,25.35 50.84,22.76 87.26,22.76 94.73,15.29 104.03,15.29 106.62,17.88 118.5,17.88 120.94,20.32 120.94,27.63 121.25,27.94 121.25,48.05 119.72,49.58 119.72,52.93
VUSB  (1 unrouted)